# Altium PCB K13-01.PcbDoc
Units mm, origin at the board's own origin, x right, y up, seen from the top; angles counter-clockwise.
Board outline 23.13 x 83.29 mm, 2 copper layers (Top Layer, Bottom Layer); 67 components, 36 nets, 164 pads, 95 vias.
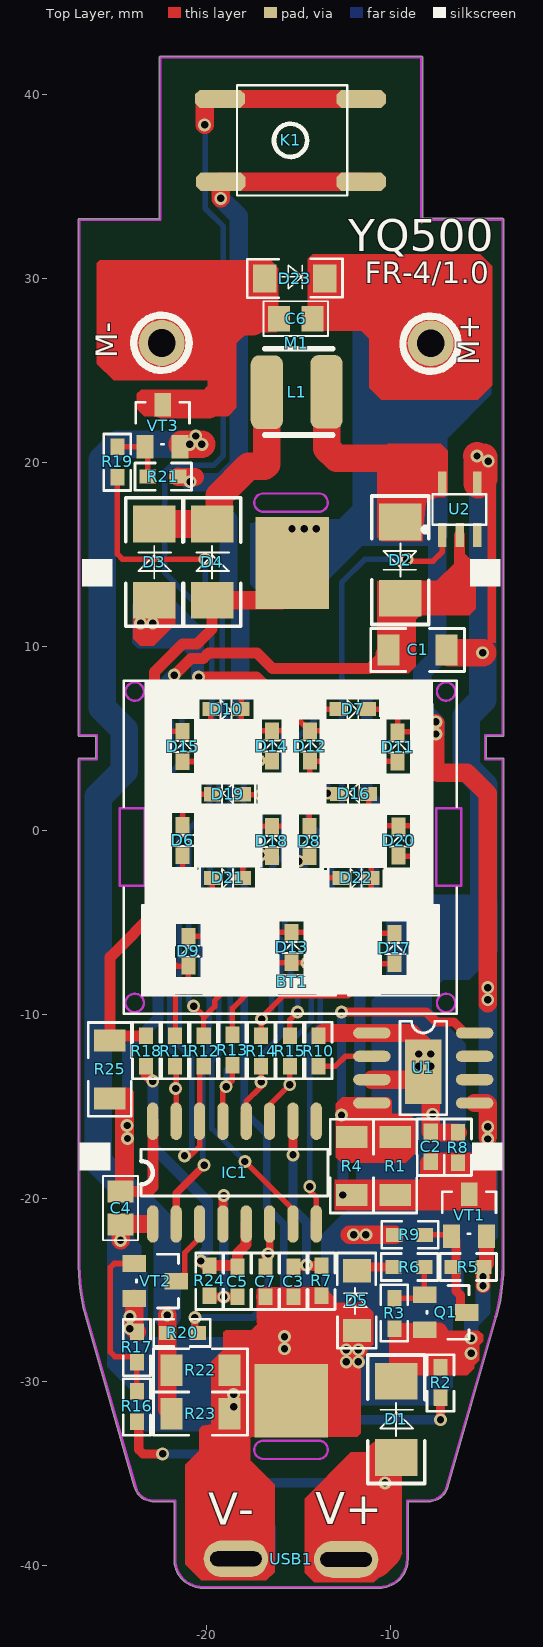
[diagram p0: Top Layer view]
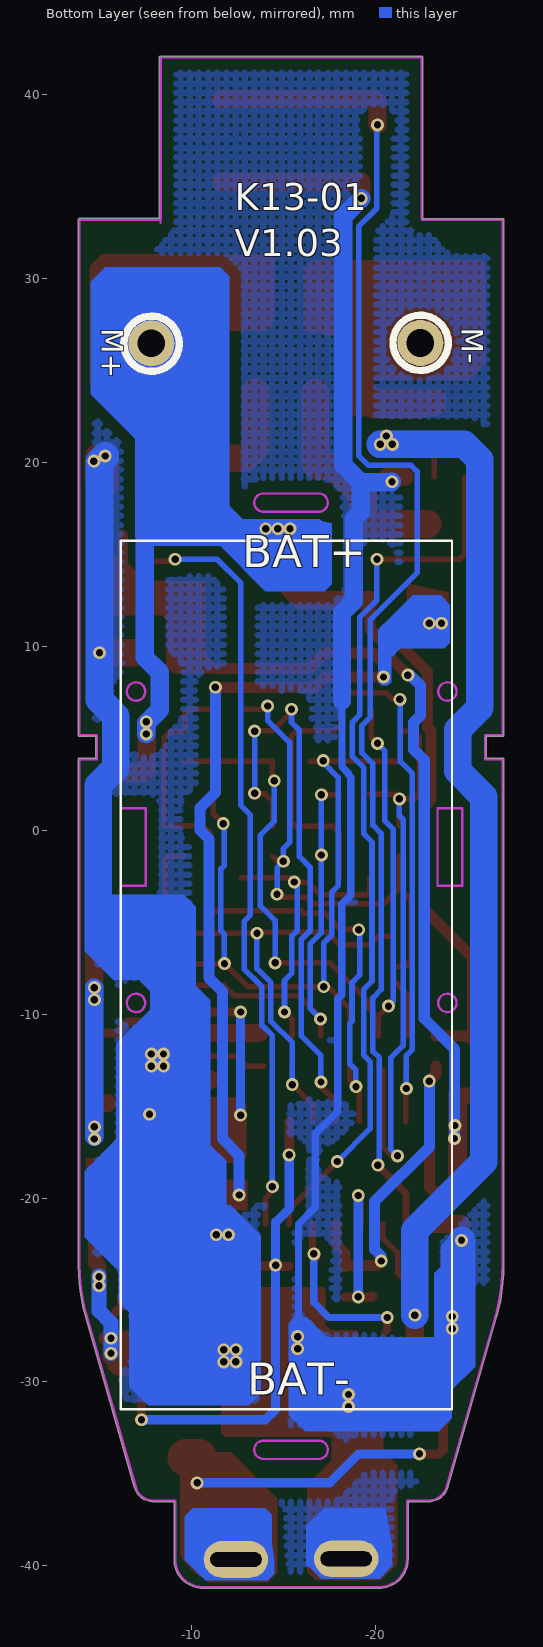
[diagram p1: Bottom Layer view, seen from below]

## Layer stack, top to bottom
Top Solder: solder mask 0.0102, Solder Resist, Dk 3.5
Top Layer: signal copper 0.0356
Dielectric 1: dielectric 0.32, FR-4, Dk 4.8
Bottom Layer: signal copper 0.0356
Bottom Solder: solder mask 0.0102, Solder Resist, Dk 3.5

## Board outline
-26.566,-26.457 cw(c-16.893,-23.679) -26.957,-23.679 -26.957,3.862 cw(c-26.893,3.862) -26.893,3.925 -26.007,3.925 -26.007,5.098 -26.893,5.098 cw(c-26.893,5.162) -26.957,5.162 -26.957,33.193 cw(c-26.893,33.193) -26.893,33.256 -22.557,33.256 -22.557,42.012 cw(c-22.493,42.012) -22.493,42.075 cw(c-22.493,42.012) -22.493,42.075 -8.293,42.075 cw(c-8.293,42.012) -8.23,42.012 -8.23,33.262 -3.893,33.262 cw(c-3.893,33.198) -3.83,33.198 -3.83,5.162 cw(c-3.893,5.162) -3.893,5.098 -4.78,5.098 -4.78,3.925 -3.893,3.925 cw(c-3.893,3.862) -3.83,3.862 -3.83,-23.679 ccw(c-3.893,-23.679) -3.83,-23.679 cw(c-13.893,-23.679) -4.221,-26.457 cw(c-4.282,-26.439) -4.223,-26.464 -6.88,-35.726 cw(c-6.943,-35.719) -6.882,-35.736 cw(c-7.905,-35.443) -7.905,-36.507 -9.03,-36.507 -9.03,-39.649 cw(c-10.593,-39.649) -10.593,-41.213 -20.193,-41.213 cw(c-20.193,-39.649) -21.757,-39.649 -21.757,-36.507 -22.882,-36.507 cw(c-22.882,-35.443) -23.905,-35.736 cw(c-23.843,-35.719) -23.907,-35.726 -26.564,-26.464 cw(c-26.505,-26.439)

## Design rules (kind name [scope] priority, off if disabled: settings)
Clearance [All vs InPolygon] p1: gap=0.6
Clearance Clearance_1 [All] p2: gap=0.2
ComponentClearance [All] p1 off: gap=0.254 collisioncheckmode=3 verticalgap=0.254 showdistances=FALSE
PolygonConnect [All] p1: connectstyle=Relief reliefconductorwidth=0.254 reliefentries=4 polygonreliefangle="90 Angle" airgapwidth=0.254
RoutingVias [All] p1: holewidth=0.4 width=0.7 viastyle="Through Hole" minholewidth=0.4 minwidth=0.7 maxholewidth=0.4 maxwidth=0.7
SolderMaskExpansion [All] p1: expansion=0.102
Width [All] p1: maxlimit=3 minlimit=0.254 preferedwidth=0.254 minimp=50.000000 maximp=50.000000 favimp=50.000000
29 further rules are at their usual default settings.

## Components (designator, comment, footprint, x,y, rotation, side; value= is the part's Value field where it differs from the comment)
BT1 "Battery" BAT#1 -15.596,-27.762 r270 top locked
C1 "22uF" 1206 -8.306,9.804 r0 top
C2 "C104" 0603 -7.798,-16.383 r270 top
C3 "C104" 0603 -15.265,-25.375 r90 top
C4 "C105" 0805N -24.663,-20.549 r270 top
C5 "C104" 0603 -18.313,-25.375 r90 top
C6 "C105" 0805N -15.138,27.813 r0 top
C7 "C104" 0603 -16.789,-25.375 r90 top
D1 "SS24" DO-214AC -9.677,-32.029 r0 top
D2 "SS14" DO-214AC -9.449,14.681 r180 top
D3 "A7" DO-214AC -22.835,14.58 r0 top
D4 "SS14" DO-214AC -19.685,14.58 r0 top
D5 "5.6V" 4148 -11.836,-25.654 r90 top
D6 "L_2E" LED0603 -21.285,-0.559 r90 top
D7 "L_3A" LED0603 -12.04,6.579 r0 top
D8 "L_3E" LED0603 -14.402,-0.61 r90 top
D9 "LED1" LED0603 -20.98,-6.579 r90 top
D10 "L_2A" LED0603 -18.923,6.579 r0 top
D11 "L_3B" LED0603 -9.601,4.521 r90 top
D12 "L_3F" LED0603 -14.376,4.572 r90 top
D13 "LED2" LED0603 -15.367,-6.375 r90 top
D14 "L_2B" LED0603 -16.434,4.572 r90 top
D15 "L_2F" LED0603 -21.285,4.547 r90 top
D16 "L_3G" LED0603 -11.989,1.981 r180 top
D17 "LED3" LED0603 -9.779,-6.426 r90 top
D18 "L_2C" LED0603 -16.434,-0.61 r90 top
D19 "L_2G" LED0603 -18.847,1.956 r180 top
D20 "L_3C" LED0603 -9.55,-0.584 r90 top
D21 "L_2D" LED0603 -18.847,-2.591 r0 top
D22 "L_3D" LED0603 -11.862,-2.591 r0 top
D23 "A7" 4148 -15.265,30.023 r0 top
IC1 "" SOP-16 -19.101,-18.618 r90 top
K1 "SW-PB" D6_SMT -15.421,37.509 r0 top
L1 "47uH" CD4X -15.088,23.825 r270 top
M1 "MOTOR" bat -10.669,26.467 r0 top
Q1 "8550" sot-23 -6.985,-26.213 r270 top
R1 "0.5R" 1206 -9.728,-18.059 r90 top
R2 "R103" 0603 -7.264,-29.21 r270 top
R3 "R103" 0603 -9.779,-27.102 r90 top
R4 "0.5R" 1206 -12.09,-18.059 r90 top
R5 "R104" 0603 -6.604,-23.749 r0 top
R6 "R202" 0603 -9.804,-23.749 r0 top
R7 "R203" 0603 -13.741,-23.673 r270 top
R8 "R103" 0603 -6.325,-18.085 r90 top
R9 "R103" 0603 -9.779,-21.996 r0 top
R10 "R202" 0603 -13.902,-12.83 r90 top
R11 "20R" 0603 -21.7,-12.83 r90 top
R12 "20R" 0603 -20.14,-12.83 r90 top
R13 "20R" 0603 -18.58,-11.128 r270 top
R14 "20R" 0603 -17.021,-12.83 r90 top
R15 "20R" 0603 -15.461,-12.83 r90 top
R16 "R103" 0603 -23.774,-30.505 r270 top
R17 "R103" 0603 -23.774,-27.28 r270 top
R18 "R103" 0603 -23.274,-12.83 r90 top
R19 "20R" 0603 -24.841,20.853 r270 top
R20 "R103" 0603 -20.472,-27.33 r180 top
R21 "R103" 0603 -23.19,19.228 r0 top
R22 "0.1R" 1206 -20.523,-29.362 r180 top
R23 "0.1R" 1206 -20.523,-31.725 r180 top
R24 "R103" 0603 -19.837,-23.673 r270 top
R25 "0.1R" 1206 -25.248,-13.208 r270 top
U1 "TP4056" ESOP-8 -8.204,-12.929 r0 top
U2 "ME2188C50M5G" SOT-23-5 -6.223,17.45 r90 top
USB1 "USB5.15" BAT#2 -15.091,-39.656 r180 top
VT1 "3401" SOT-23 -5.715,-20.93 r0 top
VT2 "8050" SOT-23 -22.784,-24.511 r270 top
VT3 "2302" sot-23 -22.377,21.996 r0 top

## Footprints (in the part's own frame and the unit in brackets; to place one, negate y for a bottom-side part, rotate by r counter-clockwise, add the part's x,y. Pads: shape width x height; smd on the part's side, far side on the other; paste and mask are expansions set on the pad)
0603 [mil]
  rect 35.43x30 smd: 1(0,0) 2(65,0)
  silkscreen extent -27,-29 94,29
0805N [mm]
  rect 1.2x1.4 smd: 1(-0.9,0) 2(0.9,0)
  silkscreen extent -1.75,-0.95 1.75,0.95
1206 [mm]
  rect 1.2x1.7 smd: 1(-1.778,0) 2(1.372,0)
  silkscreen extent -2.76,-1.17 2.35,1.17
4148 [mil]
  rect 50x60 smd: 1(-61,-1) 2(67,-1)
  silkscreen extent -99,-42 105,41
BAT#1 [mm]
  rect 5x4 smd: 1(-42.298,0.256)
  rect 4x4 smd: 2(3.27,0.203)
BAT#2 [mm]
  oval 3.5x2 hole 0.8 slot 2.8 at 0 deg: 1(-2.695,-0.007) 2(3.302,-0.042)
bat [mm]
  round 2.5 hole 1.5: 1(-11.76,0.025) 2(2.87,0)
CD4X [mm]
  rrect50% 4x1.75 smd: 1(0.013,-1.625) 2(-0.012,1.625)
  silkscreen extent -2.36,-1.73 2.34,1.96
D6_SMT [mm]
  oct 2.7x1 smd: 1(-3.792,-2.25) 1(3.837,-2.25) 2(-3.837,2.25) 2(3.837,2.25)
  silkscreen extent -2.91,-3 3.09,3
DO-214AC [mm]
  rect 2.3x2 smd: 1(0,-2.07) 2(0,2.07)
  silkscreen extent -1.55,-3.49 1.55,3.49
ESOP-8 [mil]
  rect 78.74x137.8 smd: 0(0,-8)
  oval 80x24 smd: 1(-110,75) 2(-110,25) 3(-110,-25) 4(-110,-75) 5(110,-75) 6(110,-25) 7(110,25) 8(110,75)
  silkscreen extent -50,-100 50,100
LED0603 [mil]
  rect 35.43x30 smd: 1(-32.5,0) 2(32.5,0)
  silkscreen extent -60,-29 62,29
SOP-16 [mil]
  oval 80x24 smd: 1(-110,150) 2(-110,100) 3(-110,50) 4(-110,0) 5(-110,-50) 6(-110,-100) 7(-110,-150) 8(-110,-200) 9(110,-200) 10(110,-150) 11(110,-100) 12(110,-50) 13(110,0) 14(110,50) 15(110,100) 16(110,150)
  silkscreen extent -50,-225 50,175
sot-23 [mil]
  rect 36x50 smd: 1(-37.5,-45) 2(37.5,-45) 3(0.5,45)
  silkscreen extent -58,-40 58,50
SOT-23 [mil]
  rect 36x50 smd: 1(-37.5,-45) 2(37.5,-45) 3(0.5,45)
  silkscreen extent -58,-40 58,50
SOT-23-5 [mm]
  rect 1.3x0.45 smd: 1(-1.4,0.95) 2(-1.4,0) 3(-1.4,-0.95) 4(1.4,-0.95) 5(1.4,0.95)
  silkscreen extent -1.2,-1.44 0.81,1.95

## Part data
C1 C2 C3 C4 C5 C6 C7: library part CAP
D1 D2 D3 D4 D5 D23: library part DIODE
D6 D7 D8 D9 D10 D11 D12 D13 D14 D15 D16 D17 D18 D19 D20 D21 D22: library part LED
IC1: library part MCU_1712
L1: library part L, "1.5A以上"
M1 R1 R2 R3 R4 R5 R6 R7 R8 R9 R10 R11 R12 R13 R14 R15 R16 R17 R18 R19 R20 R21 R22 R23 R24 R25: library part RES2
Q1: library part 8550-SMT
U2: library part TP5303
USB1: library part USB2
VT1: library part "MOSFET P"
VT2: library part 8050-SMT
VT3: library part "MOSFET N"

## Via types
v1: diameter 0.7, hole 0.4, Top Layer to Bottom Layer, 95 vias

## Nets (pads, with @x,y where several pads share a name; then routed paths per layer and width w, separated by ;. In a path a pad name is that pad's centre, name@x,y a point inside that pad or via, vN(x,y) a via of type N, cw(c..) or ccw(c..) an arc to the next point about the centre after c; other vN are vias at no path point)
+5V: C1.1 C4.1 D2.2 IC1.16 R25.2 U2.2 | length 59.6
  Top Layer w0.6: R25.2 -24.435,-14.58 -24.282,-14.732 v1@-24.282,-16.053 ; v1(-24.282,-16.764) -24.282,-18.161 -24.663,-18.542 C4.1 -23.154,-19.649 -22.911,-19.406 IC1.16 ; v1(-21.742,8.433) -20.841,9.335 -20.166,9.335 -19.874,9.627 -17.242,9.627 -16.404,8.788 -11.1,8.788 C1.1@-10.312,9.576 ; D2.2 -8.776,13.284 -6.375,13.284 -6.223,13.437 U2.2
  Top Layer w1: C1.1@-10.312,9.576 C1.1 -10.084,11.976 D2.2
  Bottom Layer w0.6: v1(-24.282,-16.764) -24.282,-11.887 -22.635,-10.24 -22.635,3.806 -22.047,4.394 -22.047,5.867 -22.428,6.248 -22.428,7.874 -21.869,8.433 v1(-21.742,8.433)
  other v1: -24.308,-16.053
+VIN: D1.2 Q1.2 R2.1 R3.1 R5.2 VT1.2 | length 16.1
  Top Layer w0.8: D1.2 -9.677,-27.203 -8.166,-27.203 Q1.2 -7.353,-27.165 -7.264,-27.254 -7.264,-27.661 ; R2.1 -7.264,-27.661 ; v1(-5.6,-27.623) -7.227,-27.623 -7.264,-27.661 ; v1(-4.953,-24.765) R5.2 -4.763,-23.558 VT1.2
  Bottom Layer w0.8: v1(-5.6,-28.448) v1(-5.6,-27.623) -5.6,-26.787 -4.953,-26.139 v1@-4.953,-24.219
  other v1: -4.953,-24.282
BAT+: BT1.1 C6.2 D4.1 D23.2 M1.2 R18.2 R25.1 U1.5 | length 105.1
  Top Layer w0.6: R18.2 -24.997,-11.179 R25.1 -25.248,-6.883 -25.222,-6.883 -22.631,-4.293 -22.631,1.291 -23.002,1.661 -23.002,5.395 -22.809,5.588 -22.809,8.611 -21.285,10.135 -20.498,10.135 -19.685,10.947 D4.1
  Top Layer w1: D4.1 -15.913,12.509 -15.339,13.083 BT1.1 v1(-15.339,16.393) ; v1@-7.544,5.817 -7.544,3.288 -7.38,3.124 -5.842,3.124 -4.699,1.981 v1@-4.699,-9.398 ; U1.5 -4.775,-14.834 -4.699,-14.91 v1@-4.699,-16.662
  Top Layer w1.5: -13.487,27.965 -13.487,29.921 D23.2 -9.703,29.997 -7.799,28.093 M1.2
  Bottom Layer w1: v1(-15.339,16.393) -7.534,16.393 -7.442,16.485 ; M1.2 -7.442,26.11 -7.442,16.485 ; v1(-7.518,5.232) -7.518,5.817 -8.255,6.553 -8.255,8.585 -7.442,9.398 -7.442,16.485 ; v1@-4.699,-16.662 v1(-4.699,-8.56)
  other v1: -4.699,-16.789 -4.699,-16.129 -4.699,-9.22 -7.518,5.893 -14.679,16.393 -14.018,16.393
GND: BT1.2 C1.2 C2.1 C3.1 C4.2 C7.1 D5.1 IC1.1 K1.1 R7.2 R8.2 R9.1 R10.2 R17.1 R21.2 R22.1 R23.1 U1.0 U1.1 U1.3 U2.4 USB1.2 VT2.2 | length 203.8
  Top Layer w0.4: -15.85,-25.375 -15.748,-25.476 v1(-15.748,-27.534)
  Top Layer w1: v1(-24.663,-22.3) C4.2 -24.627,-21.412 IC1.1@-23.114,-21.412 ; VT2.2 -23.927,-27.127 R17.1 ; R21.2 -21.514,19.202 -20.625,19.202 ; v1(-19.213,34.355) K1.1@-19.213,35.259 ; K1.1@-19.213,35.259 K1.1@-11.584,35.259 ; USB1.2@-18.745,-39.262 USB1.2 ; C7.1 -15.85,-25.375 C3.1 -13.792,-25.375 R7.2 -13.741,-26.975 ; BT1.2 -13.741,-29.382 -13.741,-26.975 ; R10.2@-13.64,-11.024 U1.1 -8.865,-11.024 -8.204,-11.684 U1.0@-8.204,-12.827 ; v1@-12.192,-21.996 R9.1 ; v1(-11.735,-28.245) -11.735,-27.28 D5.1 -13.513,-27.203 -13.741,-26.975 ; U1.3 -8.636,-13.564 U1.0 ; U1.0@-8.153,-13.183 -7.798,-13.538 C2.1 -7.747,-16.434 R8.2
  Top Layer w1.5: C1.2@-6.782,9.652 v1(-4.978,9.652) ; v1(-5.283,20.345) -5.273,20.335 U2.4 -5.219,18.796 -4.907,19.108 v1@-4.907,20.269
  Top Layer w2: USB1.2@-18.745,-39.262 R23.1 v1@-18.745,-30.683 ; v1(-18.517,-30.683) -16.605,-30.683 -16.256,-31.033 BT1.2
  Bottom Layer w0.4: -18.161,7.036 -18.161,3.445 -18.508,3.098 -18.508,3.031 -18.644,2.896 -18.644,-3.531 -18.157,-4.017 -18.157,-8.945 -17.932,-9.169 -17.932,-15.291 -16.713,-16.51 -16.713,-20.498 -15.799,-21.412 -15.799,-27.483 v1(-15.748,-27.534)
  Bottom Layer w1: v1(-20.879,18.948) -20.853,18.923 -19.177,18.923 ; v1(-19.213,34.355) -18.237,33.379 -18.237,19.863 -19.177,18.923 ; -18.161,7.036 -18.161,11.815 -18.796,12.45 -18.796,16.916 -19.177,17.297 -19.177,18.923
  Bottom Layer w1.5: v1(-24.663,-22.3) -24.663,-26.815 -23.912,-27.566 -23.912,-29.581 -22.809,-30.683 v1(-18.517,-30.683) ; v1@-11.684,-28.321 -11.328,-27.965 v1(-11.328,-21.996) -5.131,-21.996 -4.907,-21.773 -4.907,-18.821 -5.766,-18.821 -7.62,-16.967 -7.62,-13.005 v1(-7.798,-12.827) -8.611,-12.014 -8.611,-6.477 -8.507,-6.373 -5.738,-6.373 -4.907,-5.542 -4.907,2.443 -5.867,3.404 -5.867,6.198 -4.978,7.087 v1(-4.978,9.652) -4.978,20.041 v1(-5.283,20.345)
  other v1: -18.517,-31.344 -12.395,-28.905 -11.735,-28.905 -12.395,-28.245 -15.748,-28.194 -24.155,-27.102 -24.155,-26.441 -11.989,-21.996 -7.696,-15.443 -8.458,-12.827 -8.458,-12.167 -7.798,-12.167 -4.674,20.066
NetC6_1: C6.1 D23.1 M1.1 VT3.3 | length 15.1
  Top Layer w1.5: M1.1 -19.329,26.492 -19.177,26.34 -19.177,23.851 -19.888,23.139 VT3.3 ; -20.65,27.559 -20.574,27.635 -17.475,27.635 -16.815,28.296 D23.1
NetD1_1: D1.1 R16.2 USB1.1 | length 23.7
  Top Layer w0.5: R16.2 -23.673,-32.258 -23.673,-33.68 -23.444,-33.909 v1(-22.377,-33.909)
  Top Layer w2: USB1.1 -10.84,-39.649 -10.357,-39.167 -10.357,-34.106 -10.351,-34.099 D1.1
  Bottom Layer w0.5: v1(-22.377,-33.909) -19.075,-33.909 -17.501,-35.484 v1(-10.287,-35.484)
NetD2_1: D2.1 L1.2 U2.5 | length 14.1
  Top Layer w1.5: L1.2 -13.463,20.778 -12.903,20.218 -7.696,20.218 -7.696,18.898 -7.874,18.72 -9.373,18.72 -9.449,18.644 D2.1
NetD3_2: D3.2 D4.2 L1.1 | length 12
  Top Layer w1.5: D3.2 D4.2 -19.304,17.031 -19.304,18.186 -17.704,19.787 -16.84,19.787 -16.713,19.914 L1.1
NetD5_2: D5.2 R6.1 | length 2.1
  Top Layer w0.5: D5.2 -11.608,-23.749 R6.1
NetD6_1: D6.1 D7.1 D8.1 D9.1 R11.2 | length 31
  Top Layer w0.3: R11.2 -21.7,-8.923 -20.98,-8.204 D9.1 -21.603,-7.404 -21.92,-7.087 -21.92,-3.785 -21.285,-3.15 ; D6.1 -21.285,-3.15 ; D8.1@-14.656,-1.689 D8.1 ; v1(-14.63,-3.48) -14.808,-3.658 -16.256,-3.658 -16.604,-4.005 -20.43,-4.005 -21.285,-3.15 ; v1(-14.122,6.756) -13.945,6.579 D7.1
  Bottom Layer w0.3: v1(-14.63,-3.48) -14.63,-2.032 v1(-14.973,-1.689) -14.973,-1.003 -15.316,-0.66 -15.316,4.775 -14.122,5.969 v1(-14.122,6.756)
NetD10_1: D10.1 D11.1 D12.1 D13.1 R12.2 | length 42.1
  Top Layer w0.3: v1(-20.688,-9.563) -20.14,-10.111 -20.14,-10.183 ; R12.2 -20.14,-10.183 ; v1(-20.091,4.724) -19.748,5.067 D10.1 ; v1(-14.529,-7.214) -14.541,-7.201 D13.1 -17.488,-7.201 -19.545,-9.258 -19.545,-9.588 -20.14,-10.183 ; v1(-14.478,2.692) -14.376,2.794 D12.1 -9.652,3.746 D11.1
  Bottom Layer w0.3: v1(-20.688,-9.563) -20.955,-9.296 -20.955,0.051 -20.498,0.508 -20.498,4.318 v1(-20.091,4.724) ; v1(-14.529,-7.214) -14.529,-4.902 -13.716,-4.089 -13.716,-0.279 -14.478,0.483 v1(-14.478,2.692)
NetD14_1: D14.1 D15.1 D16.1 D17.1 R13.1 | length 39.4
  Top Layer w0.3: -20.599,3.721 D15.1 -21.26,3.746 D14.1 ; R13.1 -18.58,-9.69 -17.399,-8.509 v1(-17.17,-8.509) -13.03,-8.509 v1(-11.773,-7.252) D17.1 ; v1(-11.709,0.356) -11.163,0.902 D16.1
  Bottom Layer w0.3: v1(-17.17,-8.509) -17.17,-6.143 -17.602,-5.711 -17.602,-3.378 -17.958,-3.023 -17.958,2.87 -17.145,3.683 v1(-17.145,3.785) ; v1(-11.773,-7.252) -11.773,-5.664 -11.573,-5.464 -11.573,-2.108 -11.773,-1.908 -11.773,0.292 v1(-11.709,0.356)
NetD18_1: D18.1 D19.1 D20.1 R14.2 | length 31.7
  Top Layer w0.3: D19.1 -17.996,1.93 v1(-17.043,1.93) ; R14.2 v1@-17.021,-10.262 ; v1(-16.993,-10.262) v1@-17.021,-10.262 ; D20.1 -8.725,-1.41 -8.56,-1.575 -8.56,-8.331 -8.661,-8.433 -11.735,-8.433 -12.311,-9.009 -15.824,-9.009 -17.021,-10.206 v1@-17.021,-10.262
  Bottom Layer w0.3: v1(-17.043,1.93) v1(-17.043,-1.346) -17.043,-5.562 -16.443,-6.163 -16.443,-9.712 v1(-16.993,-10.262)
NetD21_1: D21.1 D22.1 R15.2 | length 17.1
  Top Layer w0.3: D21.1 -19.672,-3.34 -19.507,-3.505 -16.967,-3.505 -16.281,-2.819 v1(-15.57,-2.819) -15.342,-2.591 D22.1 ; R15.2 -15.461,-10.305 v1(-15.037,-9.881)
  Bottom Layer w0.3: v1(-15.57,-2.819) -15.731,-2.98 -15.731,-5.461 -15.443,-5.748 -15.443,-7.772 -15.037,-8.179 v1(-15.037,-9.881)
NetQ1_1: Q1.1 R3.2 R6.2 | length 3.2
  Top Layer w0.3: R3.2 -8.319,-25.451 Q1.1 ; Q1.1@-8.153,-25.235 R6.2
NetQ1_3: Q1.3 R5.1 R9.2 VT1.1 | length 6
  Top Layer w0.3: R9.2 VT1.1@-6.744,-21.996
  Top Layer w0.5: VT1.1@-6.744,-21.996 VT1.1 -6.426,-22.314 -6.426,-25.044 -6.185,-25.286 -6.185,-25.883 Q1.3
NetR1_2: R1.2 R4.2 U1.4 U1.8 | length 17.2
  Top Layer w0.5: v1(-12.649,-9.881) -8.052,-9.881 -7.509,-10.423 -6.544,-10.423 -5.944,-11.024 U1.8
  Top Layer w1: R4.2 -10.998,-16.688 ; -10.998,-15.215 -10.998,-16.688 ; R1.2 -10.998,-16.688
  Bottom Layer w0.5: v1(-12.649,-15.494) v1(-12.649,-9.881)
NetR10_1: R10.1 U1.2 | length 3.1
  Top Layer w0.3: R10.1 -12.983,-12.83 -12.446,-12.294 U1.2
NetR16_1: R16.1 R17.2 VT2.1 | length 9.2
  Top Layer w0.3: VT2.1 -25.006,-23.558 -25.212,-23.764 -25.212,-28.382 -24.968,-28.626 -24.079,-28.626 R17.2 R16.1
NetR19_1: R19.1 R21.1 VT3.1 | length 3.2
  Top Layer w0.3: R19.1 VT3.1 -23.19,20.714 R21.1
NetR20_2: R20.2 R22.2 R23.2 VT3.2 | length 61.4
  Top Layer w1: v1(-22.123,-26.365) R20.2 -22.123,-31.496 R23.2
  Top Layer w1.5: VT3.2@-21.298,20.98 v1(-20.244,20.98)
  Bottom Layer w1.5: v1(-22.123,-26.365) -22.123,-21.768 -25.88,-18.011 -25.88,1.806 -24.46,3.226 -24.46,5.461 -25.654,6.655 -25.654,20.142 -24.816,20.98 v1(-20.244,20.98)
  other v1: -20.904,20.98 -20.574,21.438
PIN_BUZZ: IC1.9
PIN_EN: IC1.8 U2.1 | length 43.2
  Top Layer w0.3: v1(-14.376,-19.38) -14.376,-19.609 -14.021,-19.964 IC1.8 ; v1(-9.093,14.732) -8.992,14.63 -7.671,14.63 -7.173,15.128 U2.1
  Bottom Layer w0.3: v1(-14.376,-19.38) -14.376,-11.172 -13.8,-10.596 -13.8,-8.509 -12.838,-7.547 -12.838,-4.967 -13.17,-4.635 -13.17,0.851 -12.649,1.372 -12.649,13.462 -11.379,14.732 v1(-9.093,14.732)
PIN_GND: C5.1 IC1.4 R24.2 | length 8.6
  Top Layer w0.5: R24.2 -19.787,-25.375 v1(-19.05,-25.375) C5.1 ; IC1.4 -19.101,-19.914 v1(-19.05,-19.863)
  Bottom Layer w0.5: v1(-19.05,-25.375) v1(-19.05,-19.863)
PIN_IOV: C7.2 IC1.6 R20.1 | length 9.9
  Top Layer w0.4: v1(-20.625,-26.492) -20.625,-27.178 R20.1 ; v1@-16.789,-23.241 -16.789,-23.063 v1@-16.65,-22.924 ; v1(-16.637,-23.038) v1@-16.586,-22.987 ; v1@-16.561,-23.012 IC1.6
  Bottom Layer w0.4: v1(-20.625,-26.492) -17.45,-26.492 -16.637,-25.679 v1(-16.637,-23.038)
PIN_KEY: IC1.2 K1.2 | length 75.4
  Top Layer w0.4: IC1.2 -21.641,-19.736 v1(-20.117,-18.212)
  Top Layer w1: v1(-20.091,38.354) -20.091,39.624 -19.956,39.759 K1.2@-11.584,39.759
  Bottom Layer w0.3: v1(-20.117,-18.212) -20.193,-18.136 -20.193,-12.37 -19.847,-12.024 -19.847,-9.534 -19.837,-9.525 -19.837,-9.119 -20.295,-8.661 -20.295,-0.178 -19.837,0.279 -19.837,3.607 -19.228,4.216 -19.228,5.664 -19.71,6.147 -19.71,11.455 -22.25,13.995 -22.25,19.507 -21.92,19.837 -19.609,19.837 -19.087,20.359 -19.087,32.842 -20.063,33.818 -20.063,38.326 v1(-20.091,38.354)
PIN_LED1: D10.2 D14.2 D18.2 D21.2 IC1.15 R11.1 | length 42.5
  Top Layer w0.3: R11.1 -21.641,-12.889 v1@-21.641,-14.072 ; v1(-21.666,-14.046) v1@-21.641,-14.072 ; IC1.15 v1@-21.641,-14.072 ; v1(-21.311,7.112) -20.93,7.112 -20.574,7.468 -18.301,7.468 -18.098,7.264 D10.2 -18.098,5.779 -17.716,5.397 D14.2 -15.684,5.397 -15.392,5.105 -15.392,0.457 -15.634,0.216 D18.2 -17.691,0.216 -18.021,-0.114 D21.2
  Bottom Layer w0.3: v1(-21.666,-14.046) -21.666,-12.239 -21.985,-11.92 -21.985,3.085 -21.336,3.734 -21.336,7.087 v1(-21.311,7.112)
PIN_LED2: D6.2 D15.2 D19.2 IC1.14 R12.1 | length 34.1
  Top Layer w0.3: D6.2 v1(-21.285,1.702) ; D15.2 -22.085,5.372 -22.352,5.105 -22.352,1.93 -22.123,1.702 v1(-21.285,1.702) ; v1(-21.184,-17.704) -20.879,-17.704 -20.371,-17.196 IC1.14 -20.371,-13.061 R12.1 ; D19.2 -21.031,1.956 v1(-21.285,1.702)
  Bottom Layer w0.3: v1(-21.285,1.702) -21.285,0.787 -21.485,0.587 -21.485,-11.713 -20.803,-12.395 -20.803,-17.323 v1(-21.184,-17.704)
PIN_LED3: D7.2 D11.2 D20.2 D22.2 IC1.13 R13.2 | length 36.2
  Top Layer w0.3: IC1.13 -19.101,-14.122 v1(-18.923,-13.945) -18.58,-13.602 R13.2 ; v1(-19.075,-5.41) -19.101,-5.385 -18.085,-5.385 -17.205,-4.505 -16.062,-4.505 -15.926,-4.369 -11.252,-4.369 -11.036,-4.153 D22.2 -11.036,-0.191 -10.604,0.241 D20.2 -8.572,0.241 -8.509,0.305 -8.509,5.055 -8.801,5.347 D11.2 -9.601,6.325 -9.855,6.579 D7.2
  Bottom Layer w0.3: v1(-19.075,-5.41) -19.101,-5.41 -19.126,-5.436 -19.126,-7.874 -18.707,-8.293 -18.707,-10.389 -18.58,-10.516 -18.58,-12.688 -18.923,-13.03 v1(-18.923,-13.945)
PIN_LED4: D8.2 D12.2 D16.2 IC1.12 R14.1 | length 33.2
  Top Layer w0.3: IC1.12 -17.831,-14.757 -17.021,-13.948 v1(-17.021,-13.691) R14.1 ; v1(-15.418,6.579) -15.418,6.439 D12.2 -13.424,5.397 v1(-13.411,5.385) ; D8.2 -14.402,1.549 -13.97,1.981 -13.411,1.981 v1(-13.411,2.007)
  Bottom Layer w0.3: v1(-17.021,-13.691) -17.021,-12.246 -15.943,-11.168 -15.943,-5.956 -16.434,-5.465 -16.434,-2.015 -15.85,-1.43 -15.85,5.436 -15.418,5.867 v1(-15.418,6.579) ; v1(-13.411,2.007) v1(-13.411,5.385)
PIN_LED5: D9.2 D13.2 D17.2 IC1.11 R15.1 | length 24.2
  Top Layer w0.3: D9.2 -20.155,-5.753 -19.685,-6.223 -18.034,-6.223 -17.361,-5.55 D13.2 -13.589,-5.55 v1(-13.538,-5.601) D17.2 ; IC1.11 -16.561,-14.935 v1(-15.461,-13.836) R15.1
  Bottom Layer w0.3: v1(-15.461,-13.836) -15.461,-11.55 -14.3,-10.389 -14.3,-8.28 -13.538,-7.518 v1(-13.538,-5.601)
PIN_M: IC1.7 R19.2 | length 48.4
  Top Layer w0.3: R19.2 -24.841,15.011 -24.562,14.732 v1(-20.066,14.732) ; v1(-17.907,-18.009) -15.291,-20.625 IC1.7
  Bottom Layer w0.3: v1(-20.066,14.732) -20.066,12.518 -19.139,11.591 -19.139,6.282 -18.728,5.871 -18.728,4.009 -19.337,3.4 -19.337,-0.186 -19.795,-0.643 -19.795,-8.204 -19.337,-8.661 -19.337,-12.221 -19.693,-12.577 -19.693,-16.223 v1(-17.907,-18.009)
PIN_USB: IC1.3 VT2.3 | length 3.6
  Top Layer w0.3: VT2.3 -21.184,-24.066 -21.184,-22.987 -20.371,-22.174 IC1.3
PIN_VBAT: C5.2 IC1.5 R18.1 R24.1 | length 16.7
  Top Layer w0.6: R18.1 -23.274,-13.276 v1(-22.911,-13.64) ; v1(-20.295,-23.419) -20.041,-23.673 R24.1 -18.364,-23.673 C5.2 -18.313,-23.012 -17.831,-22.53 IC1.5
  Bottom Layer w0.6: v1(-22.911,-13.64) -22.911,-17.221 -19.939,-20.193 -19.939,-22.784 -20.295,-23.139 v1(-20.295,-23.419)
PIN_VIN: C3.2 IC1.10 R2.2 R7.1 | length 27.1
  Top Layer w0.5: v1(-15.291,-17.653) IC1.10 ; C3.2 -13.792,-23.724 R7.1 -14.554,-23.673 v1(-14.554,-23.647) ; v1(-7.264,-32.055) R2.2
  Bottom Layer w0.5: v1(-15.291,-17.653) -15.291,-20.574 -14.554,-21.311 v1(-14.554,-23.647) -14.554,-31.496 -13.995,-32.055 v1(-7.264,-32.055)
V+: C2.2 D3.1 R1.1 R4.1 R8.1 VT1.3 | length 54.4
  Top Layer w0.6: v1(-20.422,8.331) -17.272,8.331 -16.713,7.772 v1(-11.278,7.772) ; v1(-12.573,-19.837) R4.1
  Top Layer w1: R4.1@-12.37,-19.837 R1.1 -8.179,-19.837 -7.874,-19.533 -7.874,-18.11 C2.2 -5.639,-18.034 -5.702,-18.098 VT1.3
  Bottom Layer w0.6: v1@-23.419,11.278 -23.393,11.252 v1(-22.911,11.252) -20.879,11.252 -20.422,10.795 v1(-20.422,8.331) ; v1(-12.573,-19.837) -12.573,-17.678 -11.659,-16.764 -11.659,-8.762 -10.923,-8.026 -10.923,-0.483 -10.439,0 -10.439,1.219 -11.278,2.057 v1(-11.278,7.772)
  other v1: -23.571,11.252
pads on no net: U1.6 U1.7 U2.3

## Polygon pours and split planes (outlines as drawn)
GND on Bottom Layer "Top Layer-No Net" (hatched 90Degree grid 0.5 track 0.35, remove dead copper, pour order 0): -22.2,-40.024 -22.2,-24.607 -27.407,-24.607 -27.407,30.486 -27.509,30.486 cw(c-26.797,30.486) -26.797,31.197 -24.664,31.197 ccw(c-24.664,32.772) -23.089,32.772 -23.089,42.007 cw(c-23.053,42.007) -23.053,42.043 -8.853,42.043 -8.853,33.043 ccw(c-7.053,33.043) -7.053,31.243 -5.453,31.243 cw(c-5.453,30.243) -4.453,30.243 -4.453,-24.015 ccw(c-4.42,-24.015) -4.42,-24.048 -7.722,-36.189 -9.653,-36.412 -9.678,-39.847 cw(c-10.659,-39.847) -9.965,-40.54 -10.364,-40.939 cw(c-10.795,-40.508) -10.795,-41.117 -20.753,-41.117 cw(c-20.753,-39.771) -21.705,-40.723 -22.098,-40.329 cw(c-21.792,-40.023) -22.225,-40.023 -22.225,-39.948

## Keep-outs
Keep-Out Layer:
  circle w0.127: c-6.964,-9.39 r0.5
  circle w0.127: c-6.964,7.54 r0.5
  circle w0.127: c-23.893,7.54 r0.5
  circle w0.127: c-23.893,-9.39 r0.5
  lines w0.127: -22.51,33.193 -26.893,33.193 -26.893,30.212 ; -8.293,33.012 -8.293,42.012 ; -26.893,-23.679 ccw(c-16.893,-23.679) -26.505,-26.439 ; -26.893,-23.679 ccw(c-16.893,-23.679) -26.505,-26.439 ; -26.893,-23.679 -26.893,3.862 ; -26.893,3.862 -25.943,3.862 ; -26.893,3.862 -25.943,3.862 ; -26.893,5.162 -26.893,30.212 ; -26.893,5.162 -25.943,5.162 ; -26.893,5.162 -25.943,5.162 ; -26.893,5.162 -26.893,30.212 ; -26.504,-26.439 -23.841,-35.723 -26.504,-26.439 ; -25.943,3.862 -25.943,5.162 ; -25.943,3.862 -25.943,5.162 ; -22.882,-36.443 cw(c-22.882,-35.443) -23.843,-35.719 ccw(c-22.882,-35.443) -22.882,-36.443 ; -22.882,-36.443 -21.693,-36.443 ; -22.882,-36.443 -21.693,-36.443 ; -22.493,42.012 -22.493,33.209 -22.493,42.012 ; -22.493,42.012 -8.293,42.012 ; -22.493,42.012 -8.293,42.012 ; -21.693,-39.649 ccw(c-20.193,-39.649) -20.193,-41.149 ; -21.693,-39.649 ccw(c-20.193,-39.649) -20.193,-41.149 ; -21.693,-39.649 -21.693,-36.443 ; -21.693,-39.649 -21.693,-36.443 ; -20.193,-41.149 -10.593,-41.149 ; -20.193,-41.149 -10.593,-41.149 ; -16.893,-34.188 cw(c-16.893,-33.688) -16.893,-33.188 ; -16.893,-34.188 cw(c-16.893,-33.688) -16.893,-33.188 ; -16.893,-34.188 -13.893,-34.188 ; -16.893,-34.188 -13.893,-34.188 ; -16.893,-33.188 -13.893,-33.188 ; -16.893,-33.188 -13.893,-33.188 ; -16.893,17.312 cw(c-16.893,17.812) -16.893,18.312 ; -16.893,17.312 cw(c-16.893,17.812) -16.893,18.312 ; -16.893,17.312 -13.893,17.312 ; -16.893,17.312 -13.893,17.312 ; -16.893,18.312 -13.893,18.312 ; -16.893,18.312 -13.893,18.312 ; -13.893,-34.188 ccw(c-13.893,-33.688) -13.893,-33.188 ; -13.893,-34.188 ccw(c-13.893,-33.688) -13.893,-33.188 ; -13.893,17.312 ccw(c-13.893,17.812) -13.893,18.312 ; -13.893,17.312 ccw(c-13.893,17.812) -13.893,18.312 ; -10.593,-41.149 ccw(c-10.593,-39.649) -9.093,-39.649 ; -10.593,-41.149 ccw(c-10.593,-39.649) -9.093,-39.649 ; -9.093,-39.649 -9.093,-36.443 ; -9.093,-39.649 -9.093,-36.443 ; -9.093,-36.443 -7.905,-36.443 ; -9.093,-36.443 -7.905,-36.443 ; -8.293,42.012 -8.306,41.999 -8.306,33.198 -3.893,33.198 -3.893,30.212 ; -7.905,-36.443 ccw(c-7.905,-35.443) -6.943,-35.719 cw(c-7.905,-35.443) -7.905,-36.443 ; -4.843,3.862 -3.893,3.862 ; -4.843,3.862 -4.843,5.162 ; -4.843,3.862 -4.843,5.162 ; -4.843,3.862 -3.893,3.862 ; -4.843,5.162 -3.893,5.162 ; -4.843,5.162 -3.893,5.162 ; -3.893,-23.679 cw(c-13.893,-23.679) -4.282,-26.439 ccw(c-13.893,-23.679) -3.893,-23.679 ; -3.893,-23.679 -3.893,3.862 ; -3.893,5.162 -3.893,30.212 ; -3.893,5.162 -3.893,30.212 ; -24.71,-3.026 -24.71,1.186 -23.36,1.186 -23.36,-3.026 -24.71,-3.026 ; -7.497,-3.026 -7.497,1.186 -6.147,1.186 -6.147,-3.026 -7.497,-3.026 ; -6.946,-35.723 -4.282,-26.439 -6.946,-35.723

## Other copper
Top Layer:
  region net V+: -4.216,-20.193 -4.216,-17.831 -8.103,-17.831 -8.103,-20.193
  region net V+: -4.216,-20.676 -4.216,-18.999 -13.03,-18.999 -13.03,-20.676
  region net GND: -4.242,10.185 -4.242,19.863 -4.724,19.863 -4.724,10.185
  region net NetD1_1: -9.347,-39.345 -10.897,-40.894 -14.122,-40.894 -14.656,-40.361 -14.656,-36.347 -12.141,-33.833 -9.449,-33.833 -9.449,-37.694 -9.652,-37.897
  region net +VIN: -9.601,-29.642 -5.817,-29.642 -5.436,-29.261 -5.436,-28.321 -6.198,-28.321 -7.353,-27.165 -7.391,-27.203 -9.677,-27.203 -9.677,-28.905 -9.83,-29.058
  region net GND: -19.736,-32.309 -19.736,-28.905 -19.075,-28.245 -19.075,-27.305 -18.948,-27.178 -17.551,-27.178 -17.196,-26.822 -17.247,-26.772 -17.247,-24.968 -17.12,-24.841 -13.589,-24.841 -13.005,-25.425 -13.005,-25.679 -11.455,-25.679 -10.922,-26.213 -10.922,-27.94 -11.608,-28.626 -11.608,-32.791 -11.786,-32.969 -17.526,-32.969 -17.628,-33.071 -17.602,-33.096 -17.602,-34.315 -17.551,-34.315 -16.281,-35.585 -16.281,-40.335 -16.739,-40.792 -20.269,-40.792 -21.158,-39.903 -21.158,-34.493 -20.396,-33.731 -20.396,-32.563 -20.218,-32.385
  region net V+: -21.692,13.437 -21.692,11.201 -22.86,10.033 -23.597,10.033 -23.978,10.414 -23.978,12.929
  region net +5V: -24.943,-14.58 -24.943,-18.974 -24.79,-19.126 -24.105,-19.126 -23.952,-18.974 -23.952,-14.224 -24.181,-13.995 -25.248,-13.995 -25.425,-14.173
  region net +5V: -8.712,13.538 -7.493,13.538 -6.502,14.529 -6.502,15.088 -5.994,15.088 -5.359,14.453 -5.359,12.04 -5.715,11.684 -8.382,11.684 -8.611,11.455 -8.611,8.915 -8.992,8.534 -10.998,8.534 -10.998,9.068 -10.719,9.347 -10.719,13.564
  region net NetR1_2: -12.954,-14.884 -12.598,-14.529 -10.084,-14.529 -9.931,-14.681 -9.931,-15.367 -9.881,-15.418 -8.966,-15.418 -8.636,-15.748 -8.636,-17.551 -9.169,-18.085 -12.649,-18.085 -12.954,-17.78
  region net BAT+: -14.478,27.965 -14.478,31.064 -14.224,31.318 -5.105,31.318 -4.445,30.658 -4.445,24.181 -5.232,23.393 -10.49,23.393 -11.151,24.054 -11.151,26.721 -11.582,27.153 -14.072,27.153 -14.376,27.457
  region net NetC6_1: -19.634,24.46 -25.044,24.46 -25.959,25.375 -25.959,30.836 -25.806,30.988 -16.51,30.988 -16.078,30.556 -16.078,27.203 -16.205,27.076 -17.755,27.076 -18.364,26.467 -18.364,22.962 -18.821,22.504 -23.368,22.504 -23.774,22.911 -23.774,23.724 -23.546,23.952 -19.99,23.952 -19.812,24.13
  region net NetD2_1: -10.693,15.926 -10.693,20.447 -10.135,21.006 -7.264,21.006 -6.883,20.625 -6.883,18.263 -7.036,18.11 -7.747,18.11 -8.077,17.78 -8.23,16.078 -8.23,15.723 -8.585,15.723 -10.49,15.723
  region net +VIN: -7.137,-27.203 -5.182,-27.203 -4.953,-27.432 -4.953,-27.788 -5.156,-27.991 -5.156,-28.829 -5.944,-29.616 -6.883,-29.616 -6.883,-29.591 -7.417,-29.058 -7.417,-27.915
Bottom Layer:
  region net NetD1_1: -14.351,-38.76 -14.351,-37.211 -13.995,-36.855 -10.058,-36.855 -9.601,-37.313 -9.601,-39.675 -10.719,-40.792 -14.122,-40.792 -14.478,-40.437 -14.478,-39.726
  region net GND: -20.523,-36.855 -17.196,-36.855 -16.231,-37.821 -16.231,-39.98 -16.332,-39.98 -17.043,-40.691 -20.218,-40.691 -20.879,-40.03 -20.879,-38.862
  region net GND: -5.283,-3.505 -9.55,-3.505 -10.211,-4.166 -10.211,-8.458 -10.998,-9.246 -10.998,-17.12 -11.862,-17.983 -11.862,-20.396 -12.116,-20.396 -13.741,-22.022 -13.741,-30.632 -13.106,-31.267 -7.62,-31.267 -6.604,-30.251 -6.604,-26.213 -6.02,-25.629 -6.02,-23.851 -5.893,-23.851 -4.166,-22.123 -4.166,-18.542 -5.893,-16.815 -5.893,-11.608 -7.747,-9.754 -7.747,-8.763 -7.112,-8.128 -5.715,-8.128 -4.166,-6.579 -4.166,-3.886 -4.877,-3.175
  region net GND: -23.912,-27.566 -17.33,-27.566 -16.256,-26.492 -15.57,-26.492 -15.265,-26.797 -15.265,-31.801 -16.154,-32.69 -23.419,-32.69 -24.13,-31.979 -24.13,-30.429 -25.4,-29.159 -25.4,-24.536 -24.943,-24.079 -24.943,-23.317 -23.876,-22.25 -23.546,-22.581 -23.546,-23.724 -23.19,-24.079 -23.19,-27.991
  region net V+: -22.022,12.776 -23.52,12.776 -24.028,12.268 -24.028,10.185 -23.724,9.881 -21.336,9.881 -20.828,9.373 -20.828,8.052 -20.65,7.874 -20.32,7.874 -20.168,8.026 -20.168,10.922
  region net BAT+: -17.094,16.789 -16.967,16.916 -12.776,16.916 -12.04,17.653 -12.04,30.124 -11.557,30.607 -5.283,30.607 -4.496,29.82 -4.496,23.698 -6.909,21.285 -6.909,15.926 -7.366,15.469 -11.532,15.469 -13.995,13.005 -17.221,13.005 -17.602,13.386 -17.602,16.688

## Silkscreen, mask and mechanical layers (free items; w line width, h text height)
Top Overlay:
  circle w0.4: c-22.439,26.502 r1.504
  circle w0.4: c-7.808,26.451 r1.504
  region: -3.995,13.259 -3.995,14.757 -5.666,14.757 -5.666,13.259
  region: -25.095,13.259 -25.095,14.757 -26.766,14.757 -26.766,13.259
  region: -3.893,-18.491 -3.893,-16.993 -5.565,-16.993 -5.565,-18.491
  region: -25.222,-18.491 -25.222,-16.993 -26.893,-16.993 -26.893,-18.491
  rectangle: -12.29,-4.953 -7.393,-4.063
  rectangle: -14.021,-8.941 -10.492,-4.063
  rectangle: -12.29,-8.915 -7.418,-7.976
  rectangle: -9.018,-8.839 -7.367,-4.063
  rectangle: -17.89,-4.953 -12.993,-4.063
  rectangle: -17.89,-8.941 -16.092,-4.063
  rectangle: -17.89,-8.915 -13.018,-7.976
  rectangle: -14.618,-8.839 -12.967,-4.063
  rectangle: -20.218,-9.042 -17.831,-4.063
  rectangle: -23.49,-8.915 -18.618,-7.976
  rectangle: -23.49,-8.941 -21.692,-4.063
  rectangle: -23.49,-4.953 -18.593,-4.063
  rectangle: -15.926,-3.404 -14.961,6.731
  rectangle: -10.427,-3.327 -8.458,-2.134
  rectangle: -10.389,0.838 -8.382,3.035
  rectangle: -17.221,-3.683 -13.437,-2.172
  rectangle: -22.479,-3.277 -20.333,-2.134
  rectangle: -22.428,1.016 -20.269,3.073
  rectangle: -23.36,6.121 -20.485,8.103
  rectangle: -23.36,-3.116 -21.869,8.103
  rectangle: -23.36,-4.064 -7.645,-3.116
  rectangle: -8.915,-4.064 -7.645,6.883
  rectangle: -10.617,6.147 -7.671,7.264
  rectangle: -10.528,7.264 -7.671,8.128
  rectangle: -23.063,7.112 -7.671,8.128
  rectangle: -17.374,6.02 -13.602,8.128
  rectangle: -17.221,0.851 -13.462,3.035
  rectangle: -13.843,-2.057 -10.185,1.448
  rectangle: -20.676,-2.032 -16.942,1.448
  rectangle: -13.843,2.515 -10.211,6.045
  rectangle: -20.676,2.489 -16.967,6.045
  lines w0.127: -24.482,-3.116 -24.482,-9.978 -15.428,-9.978 -6.375,-9.978 -6.375,-3.116 ; -24.482,1.276 -24.482,8.128 -15.428,8.128 -6.375,8.128 -6.375,1.276 ; -23.49,-8.987 -18.567,-8.987 -18.567,-4.063 -23.49,-4.063 -23.49,-8.987 ; -17.89,-8.987 -17.89,-4.063 -15.428,-4.063 -12.967,-4.063 -12.967,-8.987 -15.428,-8.987 -17.89,-8.987 ; -12.29,-8.987 -7.367,-8.987 -7.367,-4.063 -12.29,-4.063 -12.29,-8.987
  text "YQ500" at -12.294,30.912 h3
  text "FR-4/1.0" at -11.379,29.362 h2
  text "M-" at -24.464,25.673 h2 r90
  text "M+" at -4.779,25.292 h2 r90
  text "V+" at -14.073,-38.303 h3
  text "V-" at -19.889,-38.329 h3
Bottom Overlay:
  circle w0.4: c-22.439,26.502 r1.504
  circle w0.4: c-7.808,26.451 r1.504
  lines w0.127: -24.141,-31.486 -24.141,15.732 -6.141,15.732 -6.141,-31.486 -24.141,-31.486
  text "K13-01 / V1.03" at -12.319,30.709 h2.5
  text "M-" at -24.286,27.324 h2 r90
  text "M+" at -4.728,27.298 h2 r90
  text "BAT+" at -12.726,13.716 h3
  text "BAT-" at -13.006,-31.267 h3